# Altium PCB pcb_antenna_PCB.PcbDoc
Units mm, origin at the board's own origin, x right, y up, seen from the top; angles counter-clockwise.
Board outline 30 x 261 mm, 2 copper layers (Top Layer, Bottom Layer), stack 0.325 mm thick; 1 components, 0 nets, 3 pads, 0 vias.
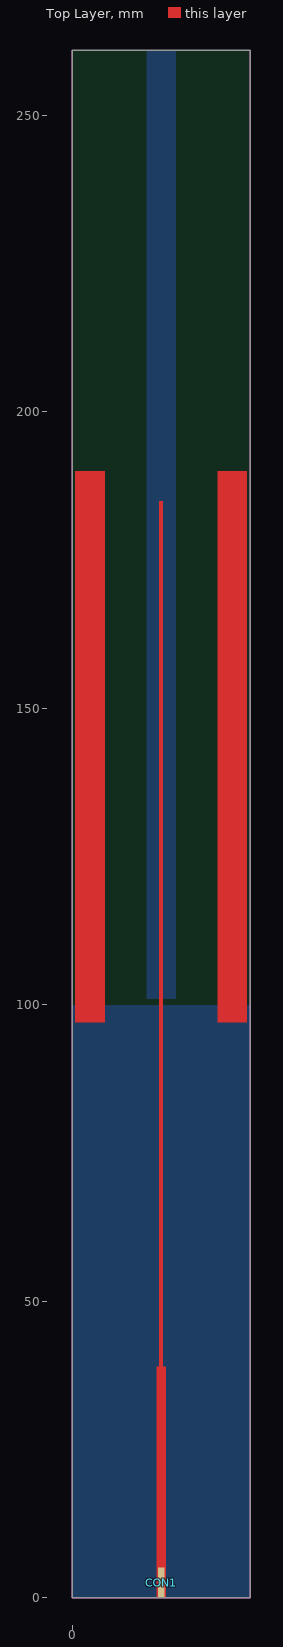
[diagram p0: Top Layer view]
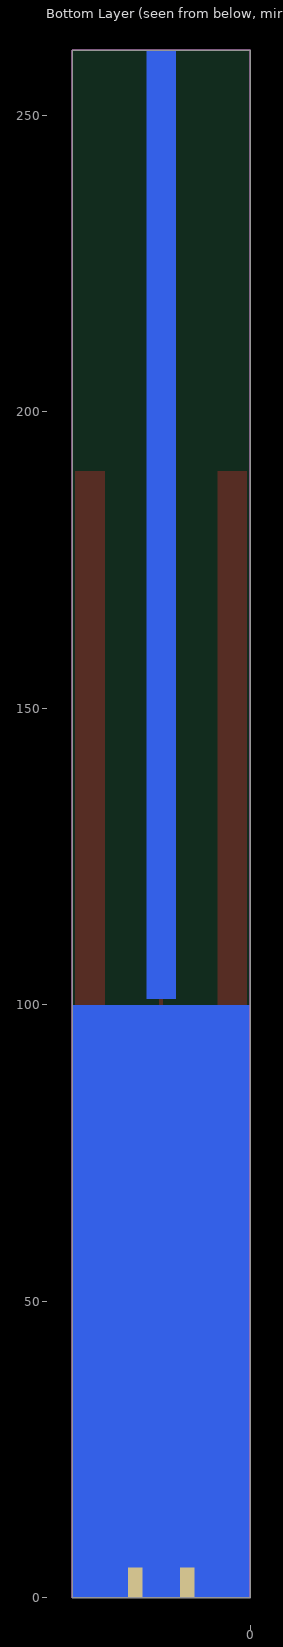
[diagram p1: Bottom Layer view, seen from below]

## Layer stack, top to bottom
Top Layer: signal copper 0.0356
Dielectric 1: core 0.254, FR-4, Dk 4.2
Bottom Layer: signal copper 0.0356

## Board outline
0,0 30,0 30,261 0,261

## Design rules (kind name [scope] priority, off if disabled: settings)
Clearance [All] p1: gap=0.254
PolygonConnect [All] p1: connectstyle=Relief reliefconductorwidth=0.254 reliefentries=4 polygonreliefangle="90 Angle" airgapwidth=0.254
RoutingVias [All] p1: holewidth=0.711 width=1.27 viastyle="Through Hole" minholewidth=0.711 minwidth=1.27 maxholewidth=0.711 maxwidth=1.27
SolderMaskExpansion [All] p1: expansion=0.102
Width [All] p1: maxlimit=0.254 minlimit=0.254 preferedwidth=0.254
30 further rules are at their usual default settings.

## Components (designator, comment, footprint, x,y, rotation, side; value= is the part's Value field where it differs from the comment)
CON1 "SMA Edge" SMA_EDGE_1 15,2.55 r0 top

## Footprints (in the part's own frame and the unit in brackets; to place one, negate y for a bottom-side part, rotate by r counter-clockwise, add the part's x,y. Pads: shape width x height; smd on the part's side, far side on the other; paste and mask are expansions set on the pad)
SMA_EDGE_1 [mil]
  rect 45x200 smd: 1(0,0)
  rect 95x200 smd far side: 2(-172.5,0) 2(172.5,0)
  body extent -187,-602 187,85, height 171

## Part data
CON1: library part 142-0701-881, "JOHNSON - 142-0701-881 - RF COAXIAL, SMA, STRAIGHT JACK, 50OHM"

## Nets (pads, with @x,y where several pads share a name; then routed paths per layer and width w, separated by ;. In a path a pad name is that pad's centre, name@x,y a point inside that pad or via, vN(x,y) a via of type N, cw(c..) or ccw(c..) an arc to the next point about the centre after c; other vN are vias at no path point)
pads on no net: CON1.1 CON1.2

## Keep-outs
Keep-Out Layer:
  the board outline again, w0.1

## Other copper
Top Layer:
  rectangle: 24.5,97 29.5,190
  rectangle: 0.5,97 5.5,190
  rectangle: 14.65,39 15.35,185
  rectangle: 14.2,0 15.8,39
Bottom Layer:
  rectangle: 12.5,101 17.5,261
  rectangle: 0,0 30,100

## Silkscreen, mask and mechanical layers (free items; w line width, h text height)
Mechanical 1:
  lines w0.025: 121.895,236.516 124.427,239.048 127.475,242.096 130.523,245.144 ; 121.895,238.04 122.903,239.048 125.951,242.096 128.999,245.144 ; 121.895,239.564 124.427,242.096 127.475,245.144 ; 121.895,241.088 122.903,242.096 125.951,245.144 ; 121.895,242.612 124.427,245.144 ; 121.895,244.136 122.903,245.144 ; 122.903,236 125.951,239.048 128.999,242.096 132.047,245.144 ; 124.427,236 127.475,239.048 130.523,242.096 133.571,245.144 ; 125.951,236 128.999,239.048 132.047,242.096 135.095,245.144 ; 127.475,236 130.523,239.048 133.571,242.096 136.619,245.144 ; 128.999,236 132.047,239.048 135.095,242.096 138.143,245.144 ; 130.523,236 133.571,239.048 136.619,242.096 139.667,245.144 ; 132.047,236 135.095,239.048 138.143,242.096 141.191,245.144 ; 133.571,236 136.619,239.048 139.667,242.096 142.715,245.144 ; 135.095,236 138.143,239.048 141.191,242.096 144.239,245.144 ; 136.619,236 139.667,239.048 142.715,242.096 145.763,245.144 ; 138.143,236 141.191,239.048 144.239,242.096 147.287,245.144 ; 139.667,236 142.715,239.048 145.763,242.096 148.811,245.144 ; 141.191,236 144.239,239.048 147.287,242.096 150.335,245.144 ; 142.715,236 145.763,239.048 148.811,242.096 150.335,243.62 ; 144.239,236 147.287,239.048 150.335,242.096 ; 145.763,236 148.811,239.048 150.335,240.572 ; 147.287,236 150.335,239.048 ; 148.811,236 150.335,237.524
  lines w0.381: 45.714,239.048 56.126,239.048 76.695,239.048 90.915,239.048 107.421,239.048 121.895,239.048 150.335,239.048 ; 45.714,242.096 56.126,242.096 76.695,242.096 90.915,242.096 107.421,242.096 121.895,242.096 150.335,242.096 ; 45.714,245.144 150.335,245.144 ; 56.126,248.192 56.126,236 ; 76.695,248.192 76.695,236 ; 90.915,248.192 90.915,236 ; 107.421,248.192 107.421,236 ; 121.895,248.192 121.895,236 ; 56.126,236 76.695,236 ; 56.126,236 45.714,236 45.714,248.192 150.335,248.192 150.335,236 121.895,236 ; 76.695,236 90.915,236 ; 90.915,236 107.421,236 ; 107.421,236 121.895,236
  text "Layer" at 47.238,245.906 h1.52
  text "Name" at 57.65,245.906 h1.52
  text "Material" at 78.219,245.906 h1.52
  text "Thickness" at 92.439,245.906 h1.52
  text "Constant" at 108.945,245.906 h1.52
  text "Board Layer Stack" at 123.419,245.906 h1.52
  text "1" at 47.238,242.858 h1.52
  text "Top Layer" at 57.65,242.858 h1.52
  text "Copper" at 78.219,242.858 h1.52
  text "0.036mm" at 92.439,242.858 h1.52
  text "2" at 47.238,239.81 h1.52
  text "Dielectric 1" at 57.65,239.81 h1.52
  text "FR-4" at 78.219,239.81 h1.52
  text "0.254mm" at 92.439,239.81 h1.52
  text "4.2" at 108.945,239.81 h1.52
  text "3" at 47.238,236.762 h1.52
  text "Bottom Layer" at 57.65,236.762 h1.52
  text "Copper" at 78.219,236.762 h1.52
  text "0.036mm" at 92.439,236.762 h1.52
  text "Dielectric1 thickness must be 0.8 mm" at 46,222.5 h5
  text "PCB is without overlay and solder layers" at 46,213.5 h5

## Dimensions
30,261 to 30,0 on Mechanical 1
0,261 to 30,261 on Mechanical 1